# EAGLE board mled_dual_board (EAGLE 5.10)
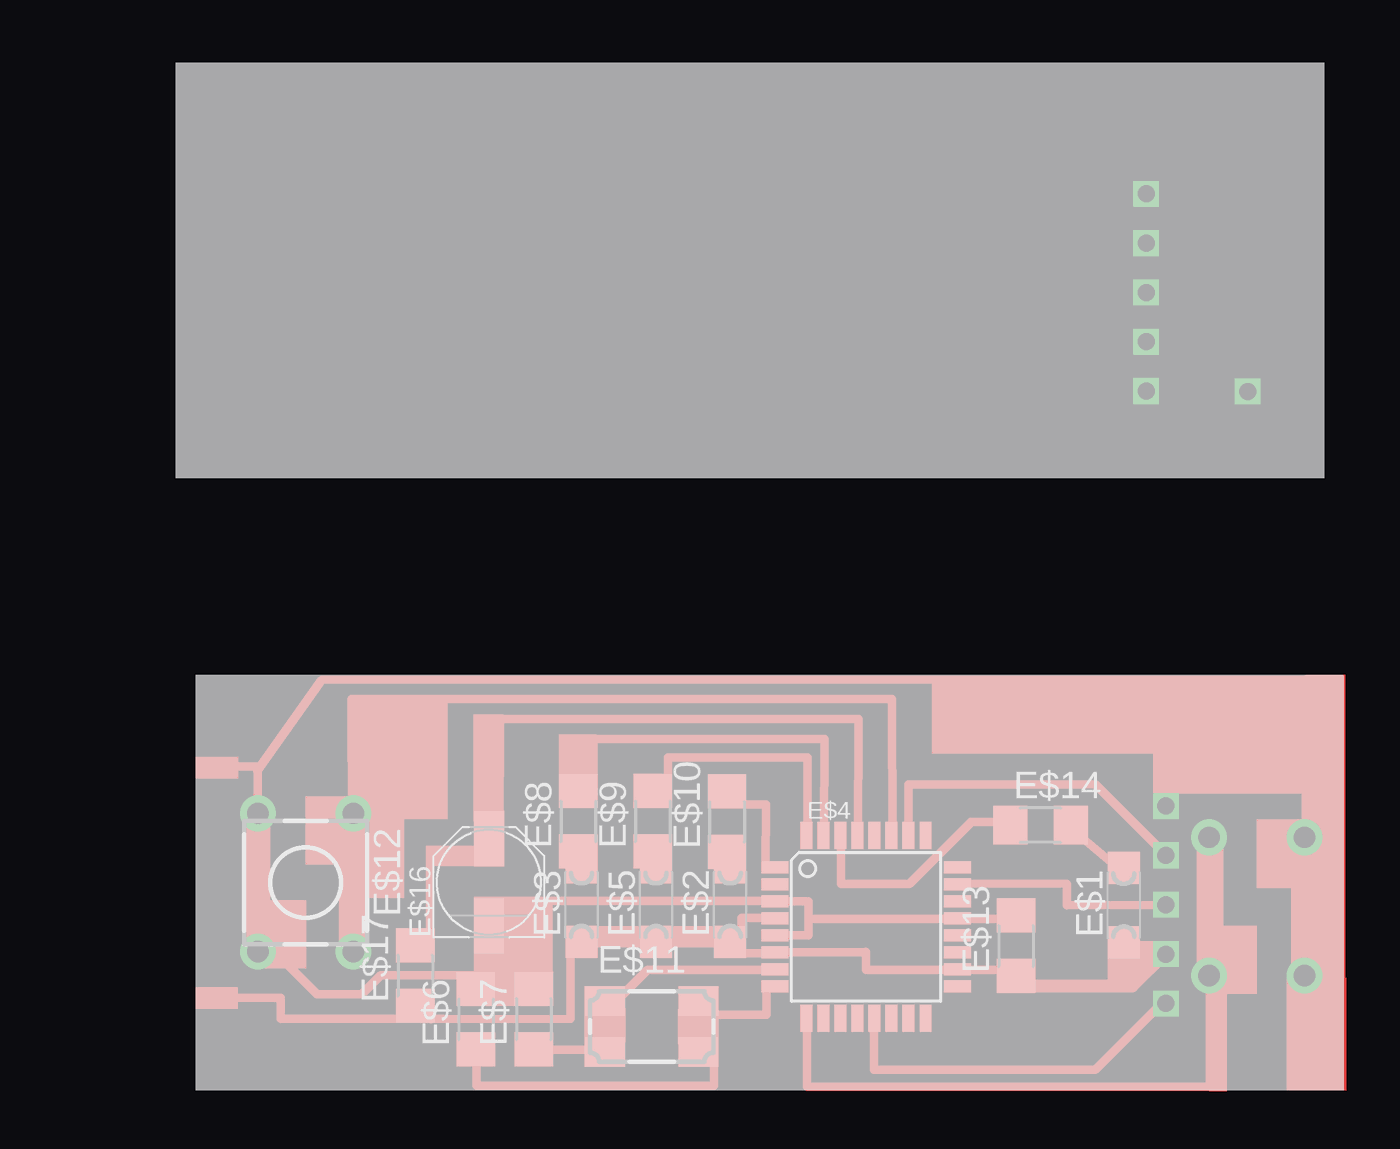
[diagram p0: board, top side]
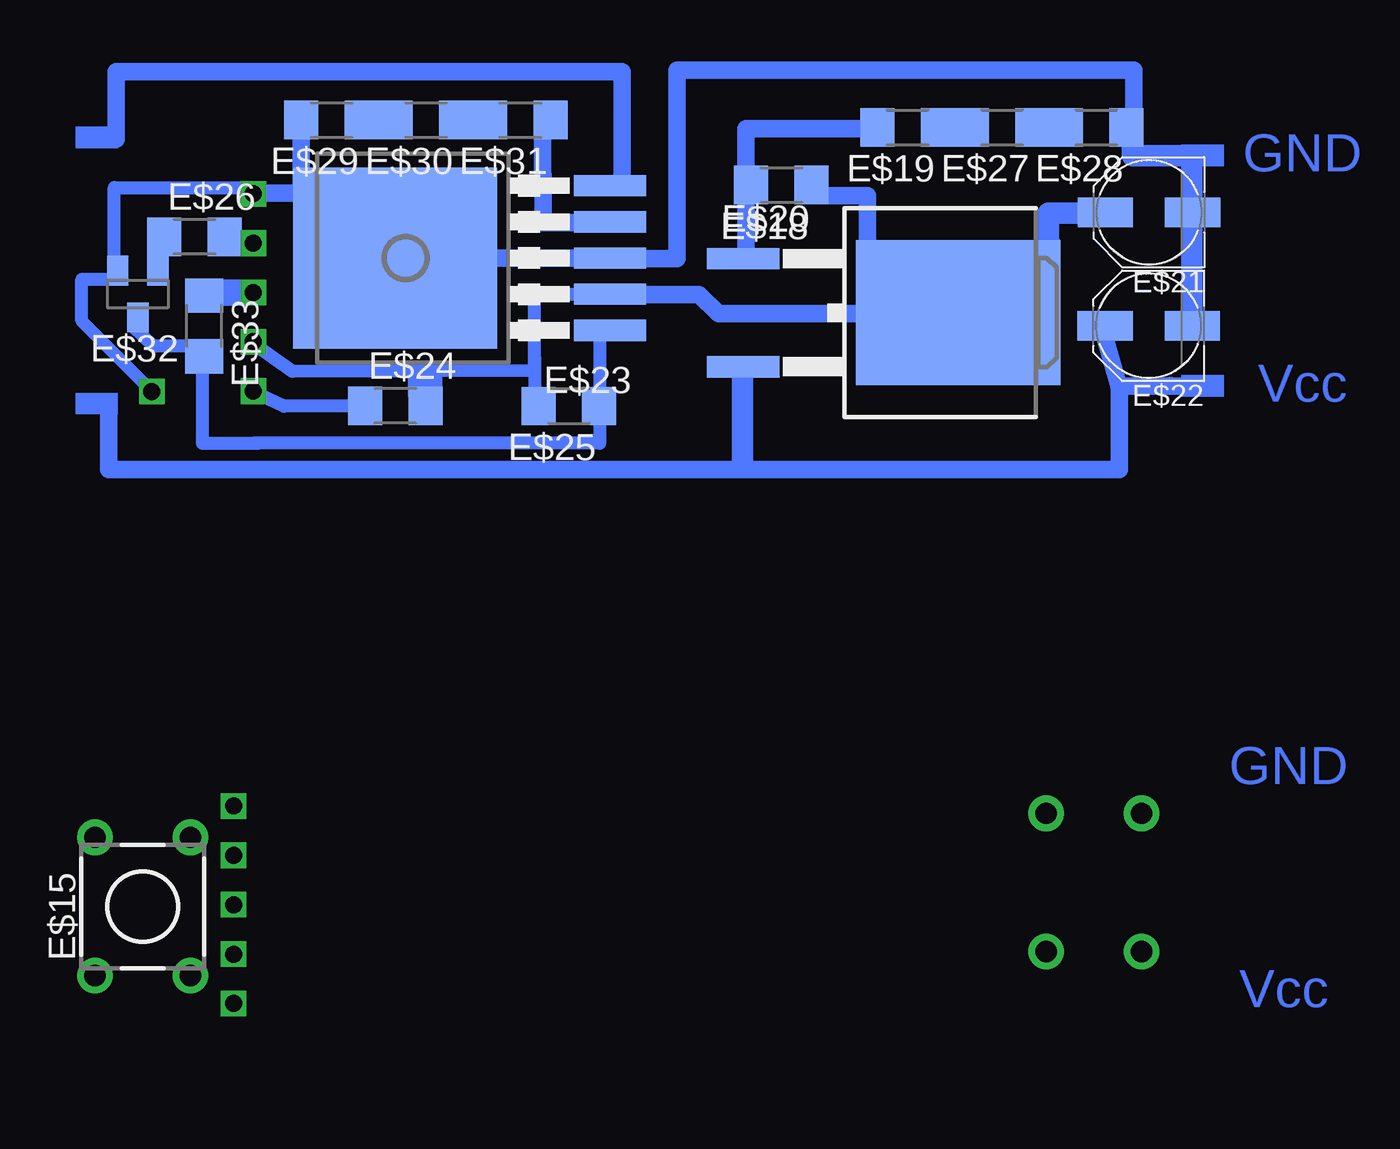
[diagram p1: board, bottom side, seen from below]

No outline drawn. Coordinates in mm, seen from the top.
Copper layers (1*16): Top 0.035mm / dielectric 1.5mm / Bottom 0.035mm
Design rules "default": minimum track width 10mil, minimum drill 24mil, track to track 8mil, track to pad 8mil, pad to pad 8mil, via to via 8mil, smd to smd 8mil, copper to edge 40mil, drill to drill 8mil, minimum pad ring 10mil, minimum via ring 8mil, stop-mask expansion 4mil, vias tented up to drill 0mil, thermal gap 10mil

## Footprints (pad centres in the part's own frame; a part is rotated, then mirrored left to right if it is on the bottom)
SML1206 = smd 1.5 x 1.5: A 1.75,0; C -1.75,0
TQFP32-08 = smd 1.27 x 0.559: 1 -4.293,2.8; 2 -4.293,2; 3 -4.293,1.2; 4 -4.293,0.4; 5 -4.293,-0.4; 6 -4.293,-1.2; 7 -4.293,-2; 8 -4.293,-2.8; 17 4.293,-2.8; 18 4.293,-2; 19 4.293,-1.2; 20 4.293,-0.4; 21 4.293,0.4; 22 4.293,1.2; 23 4.293,2; 24 4.293,2.8 | smd 0.559 x 1.27: 9 -2.8,-4.293; 10 -2,-4.293; 11 -1.2,-4.293; 12 -0.4,-4.293; 13 0.4,-4.293; 14 1.2,-4.293; 15 2,-4.293; 16 2.8,-4.293; 25 2.8,4.293; 26 2,4.293; 27 1.2,4.293; 28 0.4,4.293; 29 -0.4,4.293; 30 -1.2,4.293; 31 -2,4.293; 32 -2.8,4.293
R1206 = smd 1.6 x 1.803: 1 -1.422,0; 2 1.422,0
CTS406 = smd 1.9 x 1.4: 1 -2.2,-1.2; 2 2.2,-1.2; 3 2.2,1.2; 4 -2.2,1.2
TL1105 = drill 1 pad 1.676 round: 1 -2.25,3.25; 2 2.25,3.25; 3 -2.25,-3.25; 4 2.25,-3.25
PANASONIC_C = smd 2.6 x 1.4: + 2.05,0; - -2.05,0
TO263 = smd 1 x 3.4: 1 -2.54,-6.6; 2 2.54,-6.6 | smd 6.8 x 9.6: 3 0,3.5
TO263-51 = smd 1 x 3.4: 1 -3.4,-6.6; 2 -1.7,-6.6; 3 0,-6.6; 4 1.7,-6.6; 5 3.4,-6.6 | smd 8.5 x 9.6: 6 0,3.5
SOT23 = smd 1 x 1.4: 1 -0.95,-1.1; 2 0.95,-1.1; 3 0,1.1

## Placement (x,y rotation side)
E$1  [SML1206]  43.65,8.71 90 top
E$2  [SML1206]  25.14,8.73 90 top
E$3  [SML1206]  18.15,8.73 90 top
E$4  [TQFP32-08]  31.53,7.69 0 top
E$5  [SML1206]  21.65,8.73 90 top
E$6  [R1206]  13.19,3.35 90 top
E$7  [R1206]  15.9,3.36 90 top
E$8  [R1206]  18,12.66 90 top
E$9  [R1206]  21.5,12.66 90 top
E$10  [R1206]  24.99,12.63 90 top
E$11  [CTS406]  21.45,3 0 top
E$12  [TL1105]  5.18,9.78 180 top
E$13  [R1206]  38.58,6.8 90 top
E$14  [R1206]  39.73,12.47 0 top
E$15  [TL1105]  49.9,8.65 0 bottom
E$16  [PANASONIC_C]  13.8,9.79 90 top
E$17  [R1206]  10.33,5.41 90 top
E$18  [R1206]  19.87,42.57 180 bottom
E$19  [R1206]  13.94,45.28 180 bottom
E$20  [TO263]  15.06,36.57 270 bottom
E$21  [PANASONIC_C]  2.59,41.29 180 bottom
E$22  [PANASONIC_C]  2.6,35.95 180 bottom
E$23  [TO263-51]  34.53,39.14 90 bottom
E$24  [R1206]  38.02,32.19 0 bottom
E$25  [R1206]  29.86,32.18 180 bottom
E$26  [R1206]  47.46,40.14 0 bottom
E$27  [R1206]  9.5,45.28 180 bottom
E$28  [R1206]  5.07,45.28 180 bottom
E$29  [R1206]  41.02,45.63 180 bottom
E$30  [R1206]  36.58,45.63 180 bottom
E$31  [R1206]  32.15,45.63 180 bottom
E$32  [SOT23]  50.13,37.45 180 bottom
E$33  [R1206]  47.01,35.94 270 bottom

## Library data of the parts
E$1-E$3 E$5 = led
E$4 = atmel
E$6-E$10 E$13 E$14 E$16-E$19 E$21 E$22 E$24-E$31 E$33 = rcl
E$11 = crystal
E$12 E$15 = switch
E$20 = smd-ipc
E$23 = ref-packages
E$32 = maxim

## Tracks (layer width: path | path; a pad name or v marks a point on that pad's centre or on a via)
S$1  (via drill 0.8)
  other vias: 45.63,11.05
S$2  (via drill 0.8)
  other vias: 45.63,8.73
S$3  (via drill 0.8)
  other vias: 45.63,6.41
S$4  (via drill 0.8)
  other vias: 45.63,4.09
S$5  (via drill 0.8)
  other vias: 45.63,13.37
S$6  (via drill 0.8)
  other vias: 44.7,42.16
S$7  (via drill 0.8)
  other vias: 44.7,39.84
S$8  (via drill 0.8)
  other vias: 44.7,37.52
S$9  (via drill 0.8)
  other vias: 44.7,35.2
S$10  (via drill 0.8)
  other vias: 44.7,32.88 49.47,32.87
S$11
  Top 0.406: 26.81,10.46 26.82,13.44 25.49,13.44
S$12
  Top 0.406: 28.77,11.73 28.78,15.65 22.21,15.65 22.21,14.5
S$13
  Top 0.406: 29.56,12.01 29.57,16.52 18.71,16.52 18.71,14.07
S$14
  Top 0.406: 27.35,6.44 25.67,6.44 25.67,8.11 27.51,8.11
S$15
  Top 0.406: 27.35,8.88 28.81,8.88 28.81,7.3 27.38,7.3
S$16
  Top 1.016: 18.14,6.97 18.1,7.21 25.04,7.21
S$17
  Top 0.406: 27.28,5.66 21.26,5.66 19.69,4.09
S$18
  Top 0.406: 13.21,1.95 13.21,0.21 16.59,0.21
S$19
  Top 0.406: 24.38,3.38 24.38,0.23 16.45,0.21
S$20
  Top 0.406: 28.85,8.07 34.93,8.07 35.83,8.07 38.14,8.07 38.14,8.81
S$21
  Top 0.406: 27.34,6.49 31.53,6.49 | 31.53,6.49 31.53,6.51 | 31.53,6.49 31.53,5.67 37.74,5.67
S$22
  Top 0.406: 36.06,9.64 36.06,9.73 40.97,9.72 40.97,8.71 45.68,8.72
S$23
  Top 0.406: 45.65,6.38 44.08,4.82 42.74,4.82
S$24
  Top 0.61: 37.99,4.91 44.03,4.91
S$25
  Top 0.406: 31.91,3.44 31.91,0.98 42.32,0.98 45.41,4.07
S$26
  Top 0.406: 28.67,3.57 28.75,3.57 28.75,0.16 47.69,0.16 47.69,11.97
S$27
  Top 0.406: 23.85,3.55 26.85,3.55 26.85,4.94
S$28
  Top 0.406: 36.48,12.62 33.57,9.71 30.35,9.71 30.35,11.97
S$29
  Top 0.406: 15.72,1.91 19.39,1.91 19.13,2.05
S$30
  Top 0.406: 27.22,8.91 16.61,8.91 16.61,4.42
S$31
  Top 0.406: 18.27,6.95 17.63,6.93 17.63,3.37 11.09,3.35
S$32
  Top 0.406: 14.3,12.05 14.31,17.46 31.16,17.46 31.15,11.73
S$33
  Top 0.406: 1.35,4.35 4.01,4.35 4.01,3.36 11.67,3.36
S$34
  Top 0.406: 2.93,6.48 2.93,15.23 0.6,15.23
S$35
  Top 0.406: 13.78,12.23 13.78,10.75 11.04,10.75 11.04,6.6
S$36
  Top 0.406: 13.56,5.3 13.56,5.41 8.71,5.41 7.81,4.51 5.73,4.51 3.31,6.93
S$37
  Top 0.406: 7.38,6.52 7.35,18.4 32.75,18.4 32.78,11.8
S$38
  Top 0.406: 2.89,15.03 5.94,19.31 52.2,19.33 52.2,5.28
S$39
  Top 1.27: 52.15,5.24 52.15,11.93
S$40
  Top 0.61: 45.32,13.34 45.32,14.28 52.07,14.26
S$41
  Top 0.406: 45.66,11.04 42.32,14.38 33.52,14.38 33.52,11.65
S$42
  Top 1.27: 2.89,6.45 2.89,13.14
S$43
  Top 1.27: 7.38,6.43 7.38,13.12
S$44
  Bottom 0.61: 49.42,32.84 52.76,36.18 52.76,38.14 51.07,38.14
S$45
  Bottom 0.61: 51.24,38.63 51.24,42.46 44.65,42.46
S$46
  Bottom 0.813: 0.34,33.12 3.97,33.12 3.97,29.19 51.5,29.19 51.5,32.37
S$47
  Bottom 1.016: 0.93,35.94 0.57,35.94 0.57,43.65
S$48
  Bottom 0.813: 1.55,33.14 4,33.13 4.8,35.89
S$49
  Bottom 1.016: 21.71,33.9 21.71,29.48 21.67,29.48
S$50
  Bottom 1.016: 4.36,41.26 7.32,41.26 7.3,38.82
S$51
  Bottom 0.813: 27.81,39.14 34.75,39.14 34.75,39.23
S$52
  Bottom 0.813: 44.67,42.18 41.31,42.18 41.31,42.2
S$53
  Bottom 0.813: 27.51,37.43 23.74,37.43 22.84,36.53 14.79,36.53 14.79,36.59
S$54
  Bottom 0.61: 44.67,35.1 42.87,33.82 31.48,33.86 31.48,37.44 27.56,37.44
S$55
  Bottom 0.61: 39.76,32.17 43.27,32.17 44.72,32.87
S$56
  Bottom 0.813: 21.53,39.15 21.53,45.21 15.57,45.21
S$57
  Bottom 0.813: 15.83,38.86 15.83,42.08 18.7,42.08
S$58
  Bottom 0.61: 31.48,34.5 31.48,31.86 30.91,31.86
S$59
  Bottom 0.61: 28.41,35.72 28.41,30.43 44.69,30.43
S$60
  Bottom 1.016: -0.19,43.95 3.36,43.95 3.36,45.48
S$61
  Bottom 0.813: 27.15,39.1 24.79,39.1 24.79,47.96 3.29,47.96 3.29,45.06
S$62
  Bottom 0.813: 28.59,40.81 31.07,40.81 31.1,45.47
S$63
  Bottom 0.813: 40.58,42.32 42.46,42.32 42.46,45.52
S$64
  Bottom 0.813: 27.36,42.54 27.36,47.9 51.14,47.9 51.14,44.73 52.47,44.73
S$65
  Bottom 0.61: 44.47,30.42 47.09,30.42 47.09,34.99 49.39,34.99 50.32,35.89
S$66
  Bottom 0.61: 44.7,37.53 46.96,37.53
S$67
  Top 0.406: 41.59,11.98 43.67,10.21
S$68
  Top 0.406: 36.47,12.62 38.46,12.62
S$69
  Top 1.27: 47.72,5.27 47.72,11.96
(copper drawn outside any net)
  shapes: Bottom area x6, Top area x24

## Text on the board
Bottom: GND | Vcc | GND | Vcc